# EAGLE board dp_linistepper.v1.0 (EAGLE 6.3)
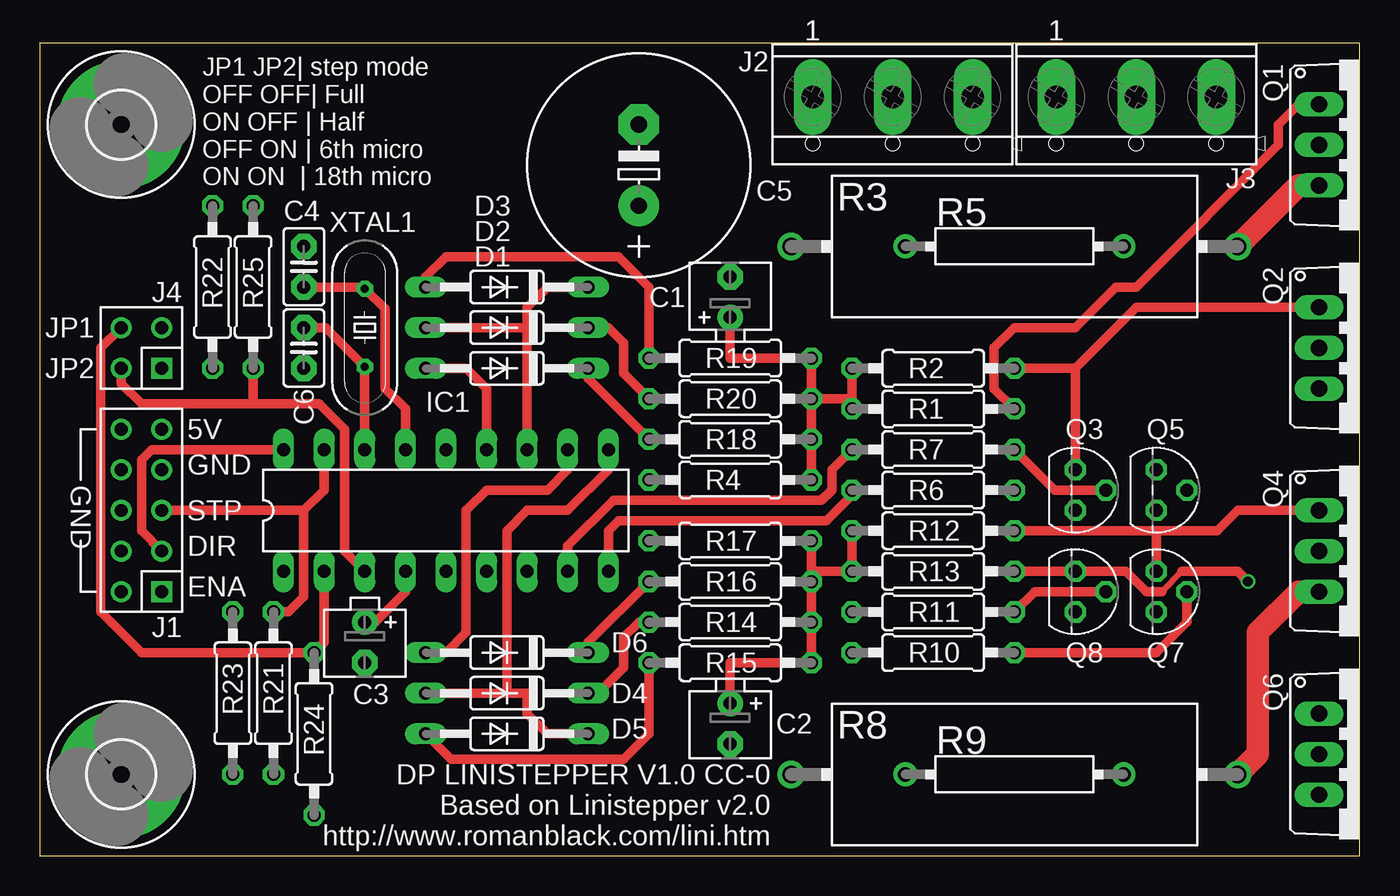
[diagram p0: board, top side]
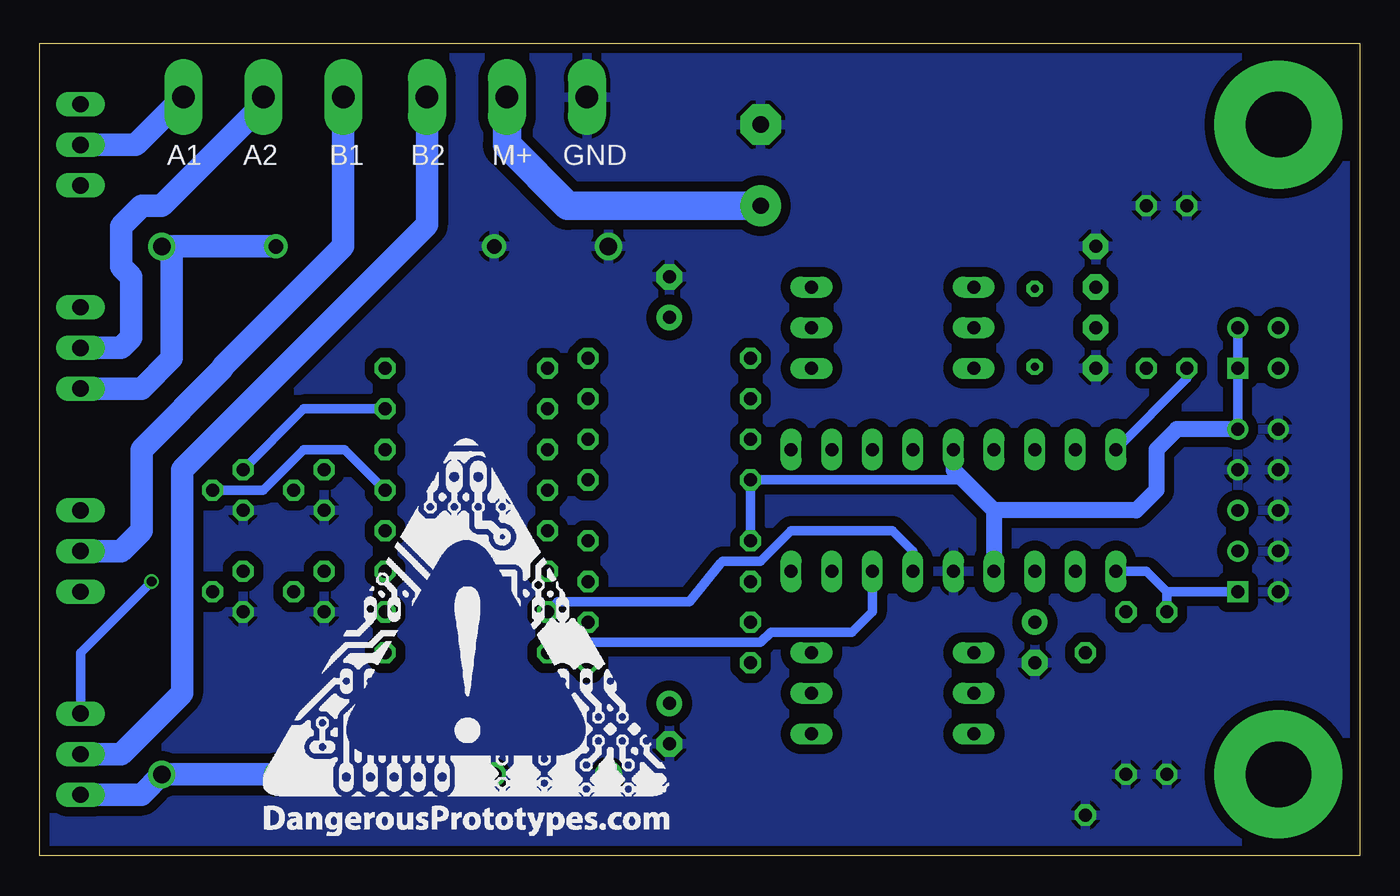
[diagram p1: board, bottom side, seen from below]

Size 82.55 x 50.8 mm. Coordinates in mm from the lower left corner, seen from the top.
Outline: 0,0 82.55,0 82.55,50.8 0,50.79 0,0
Copper layers (1*16): Top 0.035mm / dielectric 1.5mm / Bottom 0.035mm
Design rules "SeeedStudio_DRU_no_angle_2layer": minimum track width 6mil, minimum drill 12mil, track to track 6mil, track to pad 6mil, pad to pad 6mil, via to via 6mil, smd to smd 0mil, copper to edge 10mil, drill to drill 10mil, minimum pad ring 10mil, minimum via ring 6mil, stop-mask expansion 2mil, vias tented up to drill 25mil, thermal gap 10mil

## Footprints (pad centres in the part's own frame; a part is rotated, then mirrored left to right if it is on the bottom)
ETR1 = drill 0.813 pad 1.6: + -1.27,0 | drill 0.813 pad 1.6 octagon: - 1.27,0
C0.1PTH = drill 0.813 pad 1.6 octagon: 1 -1.27,0; 2 1.27,0
E5-13 = drill 1.016 pad 2.54: + -2.54,0 | drill 1.016 pad 2.54 octagon: - 2.54,0
DO35-10 = drill 0.813 long: A 5.08,0; C -5.08,0
4,1-PAD = drill 4.1 pad 8: B4,1 0,0
DIL18 = drill 0.813 long: 1 -10.16,-3.81; 2 -7.62,-3.81; 3 -5.08,-3.81; 4 -2.54,-3.81; 5 0,-3.81; 6 2.54,-3.81; 7 5.08,-3.81; 8 7.62,-3.81; 9 10.16,-3.81; 10 10.16,3.81; 11 7.62,3.81; 12 5.08,3.81; 13 2.54,3.81; 14 0,3.81; 15 -2.54,3.81; 16 -5.08,3.81; 17 -7.62,3.81; 18 -10.16,3.81
M2X5 = drill 0.8 square: 1 -5.08,-1.27 | drill 0.8: 2 -5.08,1.27; 3 -2.54,-1.27; 4 -2.54,1.27; 5 0,-1.27; 6 0,1.27; 7 2.54,-1.27; 8 2.54,1.27; 9 5.08,-1.27; 10 5.08,1.27
TERMINAL_BLOCK_3P_5 = drill 1.4 pad 2.38 long: 1 5,-0.45; 2 0,-0.45; 3 -5,-0.45
M2X2 = drill 0.8 square: 1 -1.27,-1.27 | drill 0.8: 2 -1.27,1.27; 3 1.27,-1.27; 4 1.27,1.27
TO220AV = drill 1.016 long: 1 -2.54,-2.54; 2 0,-2.54; 3 2.54,-2.54
TO92 = drill 0.813 octagon: 1 1.27,0; 2 0,1.905; 3 -1.27,0
RTH025W = drill 0.813 octagon: 1 -5.08,0; 2 5.08,0
HPS923 = drill 1.1 pad 1.7: 1 -13.97,0; 2 13.97,0
HPS63 = drill 0.9 pad 1.5: 1 -6.83,0; 2 6.83,0
HC-49U-PTH = drill 0.508 octagon: P1 -2.44,0; P2 2.44,0

## Placement (x,y rotation side)
C1  2.2uF 35V  [ETR1]  43.18,34.92 90 top
C2  2.2uF 35V  [ETR1]  43.18,8.26 270 top
C3  10uF 25V  [ETR1]  20.32,13.34 270 top
C4  22pF  [C0.1PTH]  16.51,36.83 90 top
C5  [E5-13]  37.47,43.18 90 top
C6  22pF  [C0.1PTH]  16.51,31.75 270 top
D1  1N4148  [DO35-10]  29.21,30.48 180 top
D2  1N4148  [DO35-10]  29.21,33.02 180 top
D3  1N4148  [DO35-10]  29.21,35.56 180 top
D4  1N4148  [DO35-10]  29.21,10.16 180 top
D5  1N4148  [DO35-10]  29.21,7.62 180 top
D6  1N4148  [DO35-10]  29.21,12.7 180 top
H1  MOUNT-PAD-ROUND4.1  [4,1-PAD]  5.08,45.72 0 top
H2  MOUNT-PAD-ROUND4.1  [4,1-PAD]  5.08,5.08 0 top
IC1  PIC16F628P  [DIL18]  25.4,21.59 0 top
J1  CON_HEADER_2X05-PTH  [M2X5]  6.35,21.59 90 top
J2  CON_TERMINAL_BLOCK_03-5MM  [TERMINAL_BLOCK_3P_5]  53.34,46.99 180 top
J3  CON_TERMINAL_BLOCK_03-5MM  [TERMINAL_BLOCK_3P_5]  68.58,46.99 180 top
J4  CON_HEADER_2X02-PTH  [M2X2]  6.35,31.75 90 top
Q1  TIP122  [TO220AV]  82.55,44.45 270 top
Q2  TIP122  [TO220AV]  82.55,31.75 270 top
Q3  BC337  [TO92]  64.77,22.86 270 top
Q4  TIP122  [TO220AV]  82.55,19.05 270 top
Q5  BC337  [TO92]  69.85,22.86 270 top
Q6  TIP122  [TO220AV]  82.55,6.35 270 top
Q7  BC337  [TO92]  69.85,16.51 270 top
Q8  BC337  [TO92]  64.77,16.51 270 top
R1  120R  [RTH025W]  55.88,27.94 0 top
R2  120R  [RTH025W]  55.88,30.48 0 top
R3  1R 5W  [HPS923]  60.96,38.1 0 top
R4  470R  [RTH025W]  43.18,23.5 180 top
R5  [HPS63]  60.96,38.1 0 top
R6  3.3K  [RTH025W]  55.88,22.86 0 top
R7  3.3K  [RTH025W]  55.88,25.4 0 top
R8  1R 5W  [HPS923]  60.96,5.08 0 top
R9  [HPS63]  60.96,5.08 0 top
R10  3.3K  [RTH025W]  55.88,12.7 0 top
R11  3.3K  [RTH025W]  55.88,15.24 0 top
R12  120R  [RTH025W]  55.88,20.32 0 top
R13  120R  [RTH025W]  55.88,17.78 0 top
R14  680R  [RTH025W]  43.18,14.61 0 top
R15  220R  [RTH025W]  43.18,12.06 0 top
R16  150R  [RTH025W]  43.18,17.14 0 top
R17  470R  [RTH025W]  43.18,19.68 180 top
R18  150R  [RTH025W]  43.18,26.04 0 top
R19  220R  [RTH025W]  43.18,31.11 0 top
R20  680R  [RTH025W]  43.18,28.57 0 top
R21  3.3K  [RTH025W]  14.61,10.16 90 top
R22  3.3K  [RTH025W]  10.79,35.56 270 top
R23  3.3K  [RTH025W]  12.06,10.16 90 top
R24  3.3K  [RTH025W]  17.14,7.62 90 top
R25  3.3K  [RTH025W]  13.33,35.56 270 top
U$1  FRAME_DINA4_L  [DP_LOGO]  63.5,-6.35 0 top  (outside the outline)
U$2  [DP_LOGO_ART_1X1]  68.58,1.27 0 bottom
XTAL1  16Mhz  [HC-49U-PTH]  20.32,33.02 270 top

## Library data of the parts
C1-C3 C5 = rcl
C4 C6 J1-J4 R1 R2 R4 R6 R7 R10-R25 U$2 XTAL1 = dp_devices
D1-D6 = 11 Trosh diodes
H1 H2 = holes
IC1 = microchip; MF: MICROCHIP; MPN: PIC16F628-04I/P; OC_FARNELL: 9760407; OC_NEWARK: 19C7272
Q1-Q8 = transistor
R3 R5 R8 R9 = resistor-power; OC_FARNELL: unknown; OC_NEWARK: unknown
U$1 = dp_devices; FF1: fulfillment by; FF2: Seeed Studio; FF3: www.seeedstudio.com; LICENSE: CC-0; PROJECT: DP LinisStepper v1.0; URL1: http://; URL2: DangerousPrototypes.com

## Nets
+5V: C3.+ IC1.4 IC1.14 J1.9 J4.1 J4.3 R4.2 R17.2
A1: J3.3 Q1.2
A2: J3.2 Q2.2
B1: J3.1 Q4.2
B2: J2.3 Q6.2
DIR: IC1.18 J1.3 R22.2
ENA: IC1.1 J1.1 R23.2
GND: C1.- C2.- C3.- C4.2 C5.- C6.2 IC1.5 J1.2 J1.4 J1.6 J1.7 J1.8 J1.10 J2.1 Q3.1 Q5.1 Q7.1 Q8.1 R3.1 R5.1 R8.1 R9.1 R21.1 R22.1 R23.1 R24.1 R25.1
J1: IC1.2 J4.4 R24.2
J2: IC1.3 J4.2 R25.2
M+: C5.+ J2.2
N$1: C4.1 IC1.15 XTAL1.P1
N$2: C6.1 IC1.16 XTAL1.P2
N$3: D1.C R18.1
N$4: D2.C R20.1
N$5: D3.A R19.1
N$6: C1.+ R1.1 R2.1 R4.1 R18.2 R19.2 R20.2
N$7: D2.A D3.C IC1.12
N$8: D1.A IC1.13
N$9: Q1.1 Q5.3 R1.2
N$10: Q1.3 Q2.3 R3.2 R5.2
N$11: Q2.1 Q3.3 R2.2
N$13: Q5.2 R6.2
N$14: Q3.2 R7.2
N$15: IC1.9 R6.1
N$16: IC1.8 R7.1
N$17: Q4.3 Q6.3 R8.2 R9.2
N$19: Q7.2 R10.2
N$20: Q8.2 R11.2
N$21: IC1.7 R10.1
N$22: IC1.6 R11.1
N$23: Q4.1 Q7.3 R12.2
N$24: Q6.1 Q8.3 R13.2
N$25: C2.+ R12.1 R13.1 R14.2 R15.2 R16.2 R17.1
N$26: D4.C R14.1
N$27: D5.A R15.1
N$28: D6.C R16.1
N$30: D4.A D5.C IC1.10
N$32: D6.A IC1.11
STP: IC1.17 J1.5 R21.2

## Tracks (layer width: path | path; a pad name or v marks a point on that pad's centre or on a via)
+5V
  Top 0.61: C3.+ 20.95,14.61 22.86,16.51 IC1.4
  Bottom 0.61: R17.2 R4.2 24.77,23.5 24.13,22.86 | J1.9 J4.1 J4.3
  Bottom 1.016: J1.9 11.43,26.67 12.7,25.4 12.7,22.86 13.97,21.59 22.86,21.59 | 22.86,21.59 IC1.4 | 22.86,21.59 24.13,22.86 25.4,24.13 IC1.14
A1
  Bottom 1.422: Q1.2 76.57,44.45 J3.3
A2
  Bottom 1.422: J3.2 68.58,46.99 74.93,40.64 76.2,40.64 77.47,39.37 77.47,36.83 76.83,36.2 76.83,32.38 77.47,31.75 Q2.2
B1
  Bottom 1.422: J3.1 63.58,38.1 71.12,30.56 71.12,30.48 76.2,25.4 76.2,20.32 77.47,19.05 Q4.2
B2
  Bottom 1.422: Q6.2 77.47,6.35 73.66,10.16 73.66,24.13 58.34,39.45 J2.3
DIR
  Top 0.61: J1.3 6.35,20.32 6.35,24.77 6.98,25.4 IC1.18
  Bottom 0.61: R22.2 10.79,29.84 IC1.18
ENA
  Bottom 0.61: R23.2 12.06,16.51 | J1.1 12.06,16.51 | IC1.1 13.33,17.78 12.06,16.51
GND
  pour Bottom (isolate 0.61): 0,50.8 82.55,50.8 82.55,0 0,0
J1
  Top 0.61: J4.4 3.81,31.75 3.81,15.24 4.45,14.61 6.35,12.7 R24.2 17.78,13.34 IC1.2
J2
  Top 0.61: J4.2 5.08,29.53 6.35,28.26 13.33,28.26 | 13.33,28.26 17.46,28.26 19.05,26.67 19.05,19.05 IC1.3 | R25.2 13.33,28.26
M+
  Bottom 1.778: C5.+ 49.53,40.64 53.34,44.45 J2.2
N$1
  Top 0.61: IC1.15 22.86,27.94 21.59,29.21 21.59,34.19 XTAL1.P1 20.22,35.56 C4.1
N$2
  Top 0.61: IC1.16 XTAL1.P2 | 20.22,30.48 XTAL1.P2 | C6.1 17.88,33.02 XTAL1.P2
N$3
  Top 0.61: D1.C 34.29,29.84 R18.1
N$4
  Top 0.61: D2.C 35.56,33.02 36.51,32.07 36.51,30.16 R20.1
N$5
  Top 0.61: D3.A 24.13,36.2 25.4,37.47 36.2,37.47 38.1,35.56 R19.1
N$6
  Top 0.61: R1.1 50.8,28.57 | 50.8,28.57 R2.1 | R20.2 R18.2 R4.1 | R20.2 R19.2 43.18,31.11 C1.+ | R20.2 50.8,28.57
N$7
  Top 0.61: D2.A 30.48,33.02 | D3.C 31.75,35.56 30.48,34.29 30.48,33.02 | IC1.12 30.48,33.02
N$8
  Top 0.61: IC1.13 27.94,29.21 26.67,30.48 D1.A
N$9
  Top 0.61: Q1.1 78.74,46.99 77.47,45.72 77.47,44.45 68.58,35.56 67.31,35.56 64.77,33.02 60.96,33.02 59.69,31.75 59.69,29.21 R1.2
  Bottom 0.61: R1.2 66.04,27.94 Q5.3
N$10
  Top 1.422: Q1.3 78.74,41.91 R3.2
  Bottom 1.422: Q2.3 76.2,29.21 74.3,31.11 74.3,37.47 R3.2 R5.2
N$11
  Top 0.61: Q3.3 64.77,30.48 | R2.2 64.77,30.48 | Q2.1 68.58,34.29 64.77,30.48
N$13
  Bottom 0.61: Q5.2 68.58,22.86 66.04,25.4 63.5,25.4 R6.2
N$14
  Top 0.61: Q3.2 63.5,22.86 R7.2
N$15
  Top 0.61: R6.1 50.8,22.54 49.21,20.95 36.2,20.95 35.56,20.32 IC1.9
N$16
  Top 0.61: R7.1 49.53,24.13 49.53,22.86 48.9,22.23 35.88,22.23 33.02,19.37 IC1.8
N$17
  Top 1.422: Q4.3 78.74,16.51 76.2,13.97 76.2,6.35 R8.2
  Bottom 1.422: Q6.3 76.2,3.81 R8.2 R9.2
N$19
  Top 0.61: R10.2 69.85,12.7 71.75,14.61 Q7.2
N$20
  Top 0.61: Q8.2 62.23,16.51 R11.2
N$21
  Bottom 0.61: IC1.7 30.48,15.24 31.75,13.97 36.83,13.97 37.47,13.34 50.17,13.34 R10.1
N$22
  Bottom 0.61: R11.1 50.17,15.88 41.91,15.88 39.99,18.28 39.85,18.41 37.47,18.41 35.56,20.32 29.21,20.32 27.94,19.05 IC1.6
N$23
  Top 0.61: Q4.1 74.93,21.59 73.66,20.32 69.85,20.32 | R12.2 69.85,20.32 | Q7.3 69.85,20.32
N$24  (via drill 0.61)
  Top 0.406: 71.44,17.78 70.17,16.51
  Top 0.61: v75.56,17.14 74.93,17.78 71.44,17.78 | R13.2 Q8.3 67.94,17.78 69.21,16.51 70.17,16.51
  Bottom 0.61: v75.56,17.14 80.01,12.7 Q6.1
N$25
  Top 0.61: R12.1 R13.1 48.26,17.78 | C2.+ 43.18,12.06 R15.2 R14.2 R16.2 48.26,17.78 | R17.1 48.26,17.78
N$26
  Top 0.61: D4.C 34.93,10.16 36.51,11.75 36.51,13.65 37.47,14.61 R14.1
N$27
  Top 0.61: D5.A 25.72,6.03 36.51,6.03 38.1,7.62 R15.1
N$28
  Top 0.61: D6.C 34.29,13.34 R16.1
N$30
  Top 0.61: D4.A 29.21,10.16 | 29.21,10.16 30.48,10.16 30.48,8.89 31.75,7.62 D5.C | IC1.10 35.56,24.13 33.02,21.59 30.48,21.59 29.21,20.32 29.21,10.16
N$32
  Top 0.61: D6.A 25.4,12.7 26.67,13.97 26.67,21.59 27.94,22.86 31.75,22.86 33.02,24.13 IC1.11
STP
  Top 0.61: J1.5 16.51,21.59 | R21.2 15.56,15.24 16.51,16.19 16.51,21.59 | IC1.17 17.78,22.86 16.51,21.59

## Text on the board
tPlace: JP1 JP2| step mode / OFF OFF| Full / ON OFF | Half / OFF ON | 6th micro / ON ON | 18th micro | JP1 | JP2 | 5V | GND | GND | STP | DIR | ENA | DP LINISTEPPER V1.0 CC-0 / Based on Linistepper v2.0 / http://www.romanblack.com/lini.htm
bPlace: GND | M+ | B2 | B1 | A2 | A1